# EAGLE board all_boards_revd_2 (EAGLE 6.1)
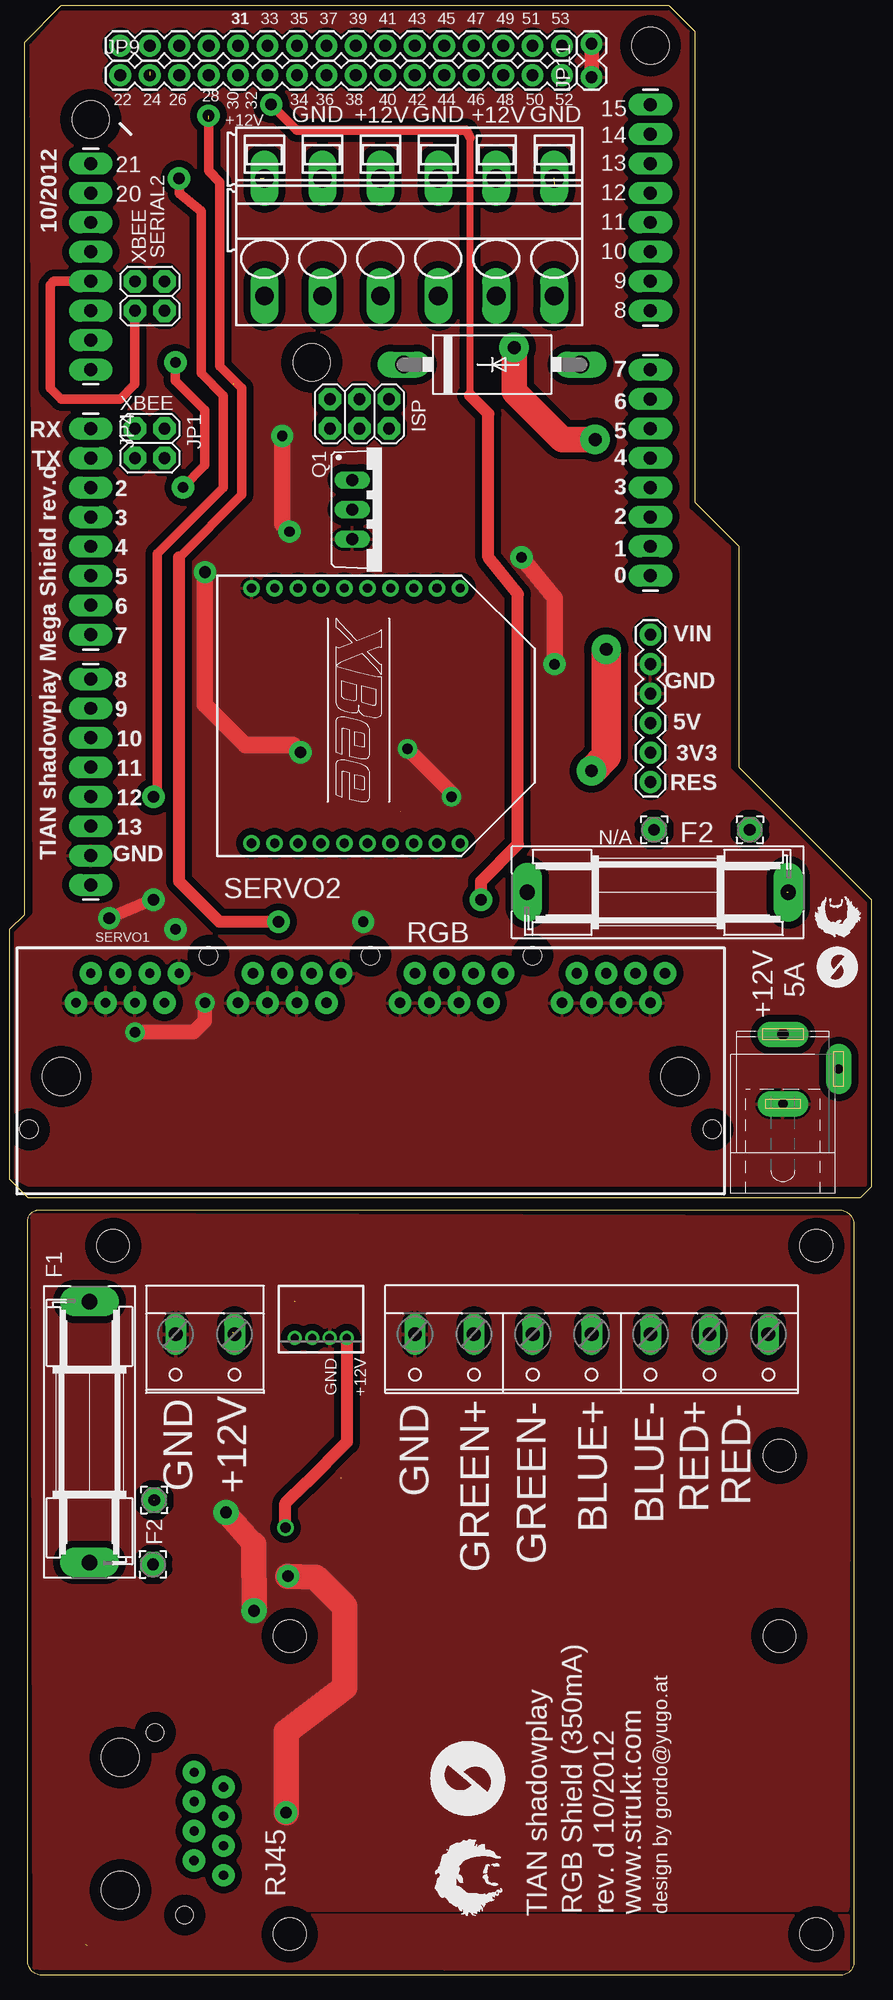
[diagram p0: board, top side]
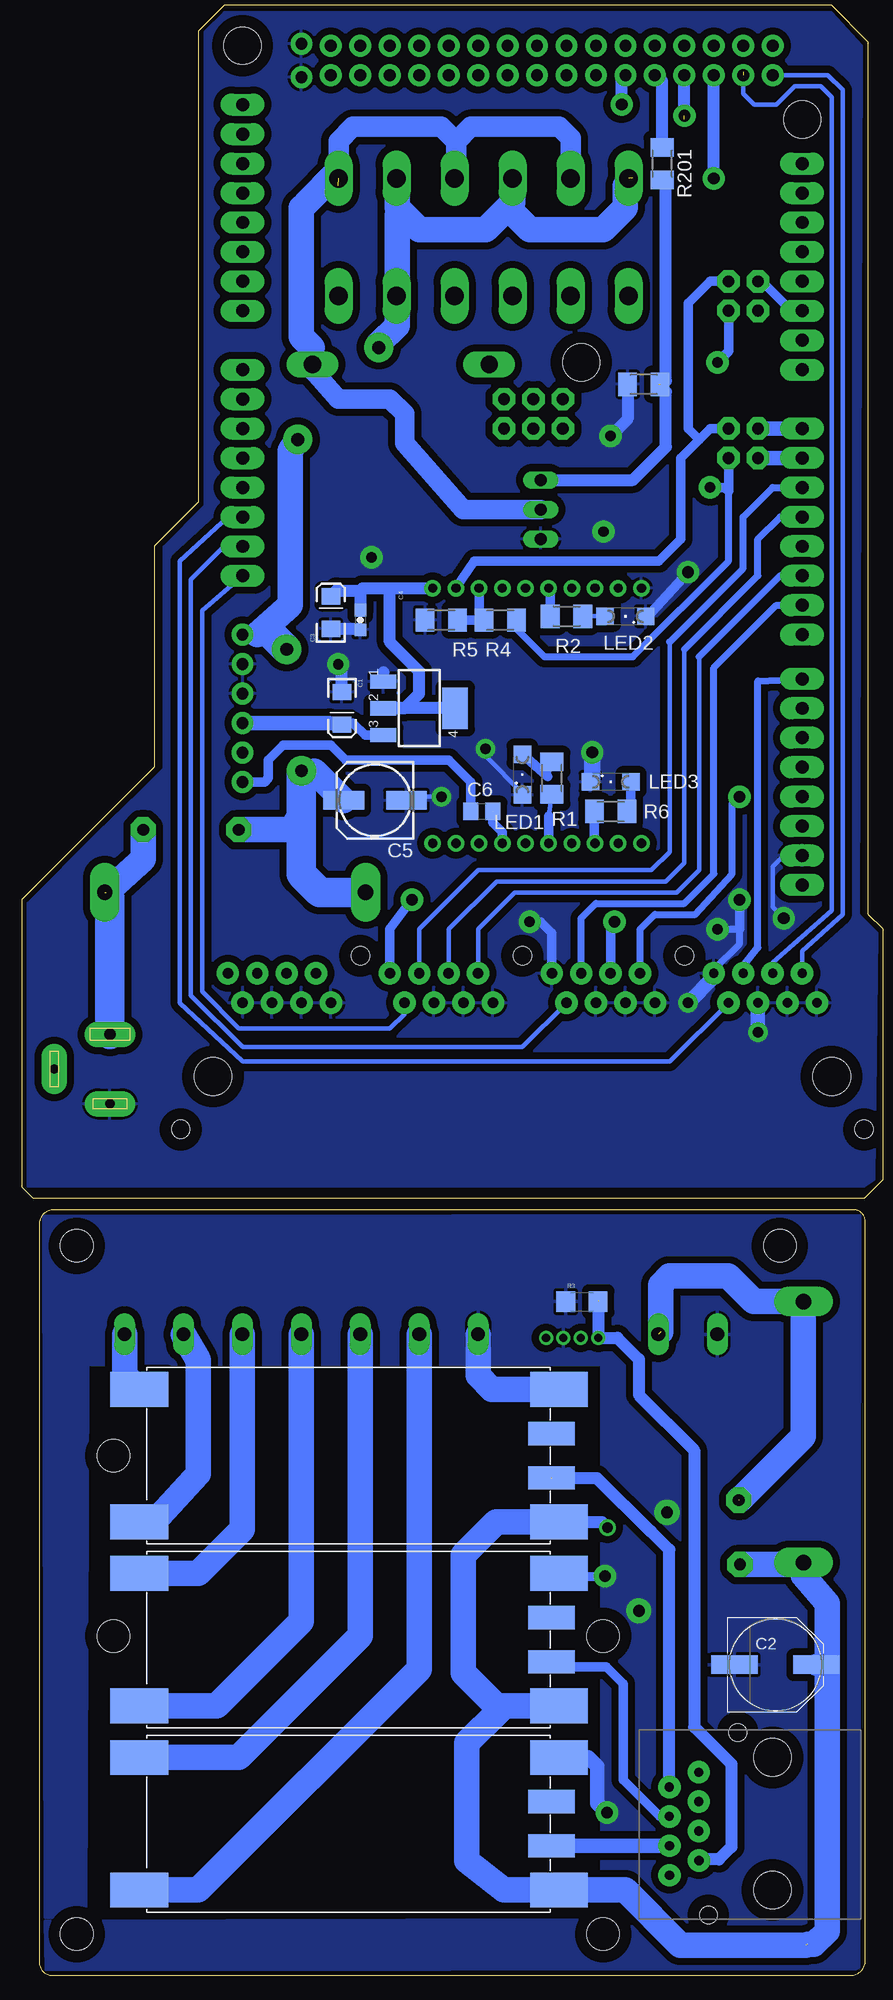
[diagram p1: board, bottom side, seen from below]

No outline drawn. Coordinates in mm, seen from the top.
Copper layers (1*16): Top 0.035mm / dielectric 1.5mm / Bottom 0.035mm
Design rules: minimum track width 10mil, minimum drill 24mil, track to track 10mil, track to pad 10mil, pad to pad 10mil, via to via 10mil, smd to smd 10mil, copper to edge 40mil, drill to drill 8mil, minimum pad ring 10mil, minimum via ring 8mil, stop-mask expansion 4mil, vias tented up to drill 0mil, thermal gap 10mil
Holes 3.2 mm at 5.21,160.4 53.47,166.75 24.26,139.45
Holes 2.8 mm at 67.77,63.23 7.12,63.23 67.77,3.86 64.59,29.58 64.59,45.14 22.36,29.58 22.36,3.86
Milling: 23 lines

## Footprints (pad centres in the part's own frame; a part is rotated, then mirrored left to right if it is on the bottom)
EIA3216 = smd 1.4 x 1.6: A 1.4,0; C -1.4,0
PANASONIC_F = smd 4 x 1.6: + 3.55,0; - -3.55,0
0603-CAP = smd 1.1 x 1: 1 -0.85,0; 2 0.85,0
153CLV-0605 = smd 3.5 x 1.6: + 2.7,0; - -2.7,0
C0805 = smd 1.3 x 1.5: 1 -0.95,0; 2 0.95,0
DO27-15 = drill 1.499 long: A 7.62,0; C -7.62,0
SH22,5 = drill 1.321 pad 2.54 long: 1 -11.252,0; 2 11.252,0
SOT223 = smd 1.219 x 2.235: 1 -2.311,-3.099; 2 0,-3.099; 3 2.311,-3.099 | smd 3.6 x 2.2: 4 0,3.099
2X03 = drill 1.016 pad 1.93 octagon: 1 -2.54,-1.27; 2 -2.54,1.27; 3 0,-1.27; 4 0,1.27; 5 2.54,-1.27; 6 2.54,1.27
SPC4077 = drill 0.8 pad 2.184 long: 1 -3,0; 2 0,-4.8 | drill 1 pad 2.184 long: 3 3,0
2X02 = drill 1.016 pad 1.93 octagon: 1 -1.27,-1.27; 2 -1.27,1.27; 3 1.27,-1.27; 4 1.27,1.27
1X08_LONGPADS = drill 1.118 pad 1.88 long: 1 0,0; 2 2.54,0; 3 5.08,0; 4 7.62,0; 5 10.16,0; 6 12.7,0; 7 15.24,0; 8 17.78,0
1X16 = drill 1.016 pad 1.88: 1 0,0; 2 2.54,0; 3 5.08,0; 4 7.62,0; 5 10.16,0; 6 12.7,0; 7 15.24,0; 8 17.78,0; 9 20.32,0; 10 22.86,0; 11 25.4,0; 12 27.94,0; 13 30.48,0; 14 33.02,0; 15 35.56,0; 16 38.1,0
1X06 = drill 1.016 pad 1.88: 1 0,0; 2 2.54,0; 3 5.08,0; 4 7.62,0; 5 10.16,0; 6 12.7,0
1X02_LOCK = drill 1.016 pad 1.88: 1 -0.178,0; 2 2.718,0
SML1206 = smd 1.5 x 1.5: A 1.75,0; C -1.75,0
2,15/1,0 = drill 1.016 pad 2.159 octagon: 1 0,0
4PORT_ETHERNET = drill 0.9 pad 1.93: P$1 25.4,8.89; P$2 24.13,6.35; P$3 22.86,8.89; P$4 21.59,6.35; P$5 20.32,8.89; P$6 19.05,6.35; P$7 17.78,8.89; P$8 16.51,6.35; P$9 11.43,8.89; P$10 10.16,6.35; P$11 8.89,8.89; P$12 7.62,6.35; P$13 6.35,8.89; P$14 5.08,6.35; P$15 3.81,8.89; P$16 2.54,6.35; P$17 -2.54,8.89; P$18 -3.81,6.35; P$19 -5.08,8.89; P$20 -6.35,6.35; P$21 -7.62,8.89; P$22 -8.89,6.35; P$23 -10.16,8.89; P$24 -11.43,6.35 | drill 0.8 pad 1.93: P$25 -16.51,8.89; P$26 -17.78,6.35; P$27 -19.05,8.89; P$28 -20.32,6.35; P$29 -21.59,8.89; P$30 -22.86,6.35; P$31 -24.13,8.89; P$32 -25.4,6.35 | hole 3.25: -26.67,0; 26.67,0 | hole 1.57: -13.97,10.41; 0,10.41; 13.97,10.41; -29.46,-4.57; 29.46,-4.57
TO220BV = drill 1.016 long: D 0,-2.54; G -2.54,-2.54; S 2.54,-2.54
M1206 = smd 1.6 x 2: 1 -1.4,0; 2 1.4,0
1206 = smd 1.6 x 1.8: 1 -1.4,0; 2 1.4,0
BUCK_LED_DRIVER = smd 5 x 3: ANODE -0.635,1.905; KATHODE -0.635,13.335; V+ 35.56,1.905; V- 35.56,13.335 | smd 4 x 2: PWM+ 34.925,5.715; PWM- 34.925,9.525
PHONEIX = drill 1.6 pad 1.8 long: 1 2.58,4.445; 2 7.58,4.445; 3 12.58,4.445; 4 17.58,4.445; 5 22.58,4.445; 6 27.58,4.445; 7 2.58,14.605; 8 7.58,14.605; 9 12.58,14.605; 10 17.58,14.605; 11 22.58,14.605; 12 27.58,14.605
1PORT_ETHERNET = drill 0.8 pad 1.93: P$1 -3.82,3.81; P$2 -6.36,2.54; P$3 -3.82,1.27; P$4 -6.36,0; P$5 -3.82,-1.27; P$6 -6.35,-2.54; P$7 -3.81,-3.81; P$8 -6.35,-5.08 | hole 3.25: 2.54,-6.35; 2.54,5.08 | hole 1.5: -3,-8.51; -0.46,7.24
W237-132 = drill 1.194 long: 1 -2.54,-0.635; 2 2.54,-0.635
W237-7P = drill 1.194 long: 1 -15.24,-0.635; 2 -10.16,-0.635; 3 -5.08,-0.635; 4 0,-0.635; 5 5.08,-0.635; 6 10.16,-0.635; 7 15.24,-0.635
S4B-ZR = drill 0.7 pad 1.1: 1 -2.25,0; 2 -0.75,0; 3 0.75,0; 4 2.25,0
XBEE = drill 0.8 pad 1.422: 1 -11,9; 2 -11,7; 3 -11,5; 4 -11,3; 5 -11,1; 6 -11,-1; 7 -11,-3; 8 -11,-5; 9 -11,-7; 10 -11,-9; 11 11,-9; 12 11,-7; 13 11,-5; 14 11,-3; 15 11,-1; 16 11,1; 17 11,3; 18 11,5; 19 11,7; 20 11,9

## Placement (x,y rotation side)
C1  10uF  [EIA3216]  44.89,109.6 270 bottom
C2  220uF  [PANASONIC_F]  7.51,27.1 0 bottom
C3  10uF  [EIA3216]  45.85,117.86 90 bottom
C4  0.1uF  [0603-CAP]  43.31,117.22 270 bottom
C5  [153CLV-0605]  42.04,101.66 180 bottom
C6  [C0805]  32.83,100.71 0 bottom
D1  BY550  [DO27-15]  39.81,139.26 0 top
F1  [SH22,5]  5.09,47.17 270 top
F2  [SH22,5]  54.1,93.73 180 top
IC2  MC33269ST-3.3T3  [SOT223]  38.23,109.6 270 bottom
ICSP  [2X03]  28.38,135 0 top
J201  [SPC4077]  64.9,78.49 90 top
JP1  [2X02]  10.29,132.46 270 top
JP2  [2X02]  10.29,145.16 270 top
JP3  [1X08_LONGPADS]  5.21,112.14 270 top
JP4  [1X08_LONGPADS]  5.21,133.73 270 top
JP5  [1X08_LONGPADS]  5.21,138.81 90 top
JP6  [1X08_LONGPADS]  53.47,143.89 90 top
JP7  [1X08_LONGPADS]  53.47,121.03 90 top
JP8  M16PTH  [1X16]  7.75,166.75 0 top
JP9  M16PTH  [1X16]  7.75,164.21 0 top
JP10  [1X06]  53.47,103.25 90 top
JP11  [1X02_LOCK]  48.39,164.21 90 top
LED1  [SML1206]  29.34,103.89 90 bottom
LED2  [SML1206]  20.45,117.54 180 bottom
LED3  [SML1206]  21.72,103.25 0 bottom
PAD1  [2,15/1,0]  62.04,99.12 90 top
PAD2  [2,15/1,0]  53.78,99.12 90 top
PAD5  [2,15/1,0]  10.67,41.3 0 top
PAD6  [2,15/1,0]  10.57,35.75 0 top
PORT201  4PORT_ETHERNET  [4PORT_ETHERNET]  29.34,77.85 0 top
Q1  IRF530  [TO220BV]  30.29,126.75 270 top
R1  1k  [M1206]  26.8,103.57 270 bottom
R2  1k  [M1206]  25.53,117.54 180 bottom
R3  10k  [1206]  24.19,58.42 0 bottom
R4  1k  [M1206]  31.24,117.22 180 bottom
R5  2k  [M1206]  36.32,117.22 180 bottom
R6  1k  [M1206]  21.72,100.71 180 bottom
R7  1k  [M1206]  18.86,137.54 0 bottom
R201  1k  [M1206]  17.27,156.59 270 bottom
U$1  BUCK_LED_DRIVER  [BUCK_LED_DRIVER]  61.73,37.52 0 bottom
U$2  BUCK_LED_DRIVER  [BUCK_LED_DRIVER]  61.73,21.64 0 bottom
U$3  BUCK_LED_DRIVER  [BUCK_LED_DRIVER]  61.73,5.77 0 bottom
U$4  MFKDSP6-5.08  [PHONEIX]  47.75,159.77 180 top
U$5  1PORT_ETHERNET  [1PORT_ETHERNET]  10.3,14.02 0 bottom
X1  [W237-132]  15.06,54.98 180 top
X3  [W237-7P]  48.4,54.98 180 top
X5  S4B-ZR  [S4B-ZR]  25.04,55.3 180 top
XB1  XBEE  [XBEE]  28.07,108.97 270 top

## Library data of the parts
C1 C3 C4 JP3-JP11 R3 = SparkFun
C2 C5 C6 R1 R2 R4-R7 R201 = rcl
D1 = diode
F1 F2 = fuse; MF: SCHURTER; MPN: 0031.8201; OC_FARNELL: 1162740; OC_NEWARK: 96F8317
IC2 = linear
ICSP JP1 JP2 = pinhead
J201 = con-jack; OC_FARNELL: unknown; OC_NEWARK: unknown
LED1-LED3 = led
PAD1 PAD2 PAD5 PAD6 = wirepad
PORT201 U$5 = strukt
Q1 = transistor-power
U$1-U$3 = tian
U$4 = con-phoenix-MFKDSP
X1 X3 = con-wago-508; OC_FARNELL: unknown; OC_NEWARK: unknown
X5 = con-jst; MF: FARNELL; MPN: S4B-ZR(LF)(SN); OC_FARNELL: 9491830; OC_NEWARK: 38K8076
XB1 = maxstream; MPN: XBP24-Z7UIT-004; OC_FARNELL: 1751799; OC_NEWARK: 34R5507

## Nets
3.3V: C3.A C4.1 IC2.2 IC2.4 XB1.1
5V: C1.A IC2.3 JP10.3
12V: C2.+ F1.2 PAD6.1 U$1.V+ U$2.V+ U$3.V+ X5.1
12V1: C5.+ F2.2 JP10.6 PAD2.1 U$4.2 U$4.4 U$4.6
+6V2: X5.3
A0: JP7.1 PORT201.P$10
A1: JP7.2 PORT201.P$18
A2: JP7.3 PORT201.P$26
A3: JP7.4
A3.3: JP10.2
A4: JP7.5
A5: JP7.6
A6: JP7.7
A7: JP7.8
A8: JP6.1
A9: JP6.2
A10: JP6.3
A11: JP6.4
A12: JP6.5
A13: JP6.6
A14: JP6.7
A15: JP6.8
AREF: JP3.8
D2: JP4.3 PORT201.P$11
D3: JP4.4 PORT201.P$13
D4: JP4.5
D5: JP4.6 PORT201.P$15
D6: JP4.7 PORT201.P$19
D7: JP4.8
D8: JP3.1 PORT201.P$27
D9: JP3.2
D10: JP3.3
D11: JP3.4
D12: JP3.5
D13: JP3.6
D14: JP5.8
D15: JP5.7
D16: JP5.6
D17: JP5.5
D18: JP2.3 JP5.4
D19: JP2.1 JP5.3
D22: JP9.1 PORT201.P$31
D23: JP8.16
D24: JP9.2 PORT201.P$29
D25: JP8.15
D26: JP9.3 PORT201.P$23
D27: JP8.14
D28: JP9.4 PORT201.P$21
D29: JP8.13
D30: JP9.5 R201.1
D31: JP8.12
D32: JP9.6 PORT201.P$9
D33: JP8.11
D34: JP9.7
D35: JP8.10
D36: JP9.8
D37: JP8.9
D38: JP9.9
D39: JP8.8
D40: JP9.10
D41: JP8.7
D42: JP9.11
D43: JP8.6
D44: JP9.12
D45: JP8.5
D46: JP9.13
D47: JP8.4
D48: JP9.14
D49: JP8.3
D50: JP9.15
D51: JP8.2
D52: JP9.16
D53: JP8.1
DIN: R4.2 R5.1 XB1.3
DOUT: JP1.2 JP2.2 XB1.2
DRAIN: D1.A Q1.D U$4.1 U$4.3 U$4.5
GND: C2.- R3.1 U$1.V- U$2.V- U$3.V- X1.2 X3.7 X5.2
GND1: C1.C C3.C C4.2 C5.- IC2.1 J201.1 JP3.7 JP10.4 JP10.5 JP11.1 JP11.2 LED1.C LED2.C LED3.C PORT201.P$2 PORT201.P$4 PORT201.P$6 PORT201.P$8 PORT201.P$12 PORT201.P$14 PORT201.P$16 PORT201.P$17 PORT201.P$20 PORT201.P$22 PORT201.P$24 PORT201.P$25 PORT201.P$28 PORT201.P$30 PORT201.P$32 Q1.S R5.2 R7.1 XB1.10
LED_ANODE_BLUE: U$2.ANODE X3.4
LED_ANODE_GREEN: U$3.ANODE X3.6
LED_ANODE_RED: U$1.ANODE X3.2
LED_KATHODE_BLUE: U$2.KATHODE X3.3
LED_KATHODE_GREEN: U$3.KATHODE X3.5
LED_KATHODE_RED: U$1.KATHODE X3.1
N$1: F1.1 PAD5.1 X1.1
N$4: Q1.G R7.2 R201.2
N$5: LED1.A R1.1
N$6: R1.2 XB1.15
N$7: LED2.A R2.1
N$8: R2.2 XB1.6
N$9: JP1.4 JP2.4 R4.1
N$10: R6.2 XB1.13
N$11: LED3.A R6.1
N$12: C6.2 XB1.17
N$13: F2.1 J201.3 PAD1.1
PWM_BLUE: U$2.PWM+ U$5.P$4
PWM_GREEN: U$3.PWM+ U$5.P$6
PWM_RED: U$1.PWM+ U$5.P$2
RES: C6.1 JP10.1
RX0: JP1.1 JP4.1
SCL: JP5.1
SDA: JP5.2
TEMP: R3.2 U$5.P$7 X5.4
TX1: JP1.3 JP4.2
VCC: D1.C

## Tracks (layer width: path | path; a pad name or v marks a point on that pad's centre or on a via)
3.3V
  Bottom 1.016: C3.A 45.34,119.76 43.31,119.76 | 43.31,119.76 43.1,119.97 40.77,119.97 | 40.77,119.97 XB1.1 | 43.31,119.76 C4.1 | IC2.4 IC2.2 | IC2.2 41.4,109.6 | IC2.2 39.5,109.6 38.23,110.87 38.23,112.78 40.77,115.32 40.77,119.97
5V
  Bottom 0.406: C1.A 45.02,108.2
  Bottom 0.813: IC2.3 42.9,107.29 43.94,108.33 45.72,108.33 C1.A
  Bottom 1.27: JP10.3 45.98,108.33 C1.A
12V  (via drill 0.9 pad 1.42)  (1 unrouted)
  Top 1.016: X5.1 27.29,46.31 23.77,42.79 | 23.77,42.79 23.72,42.74 | v22,38.94 22,41.05 23.74,42.79 23.77,42.79
  Bottom 1.016: U$1.V+ 22.48,39.42 v22,38.94
  Bottom 1.676: U$3.V+ 27.76,7.67 | 28.4,23.55 26.49,23.55 U$2.V+ | U$1.V+ 28.71,39.42
  Bottom 1.93: 31.25,23.23 30.94,23.55 | 26.49,23.55 26.49,23.86 | C2.+ 3.06,27.1
  Bottom 2.184: 4.9,2.91 15.7,2.91 20.46,7.67 U$3.V+ | 27.76,7.67 30.94,7.67 34.11,10.21 34.11,20.37 31.25,23.23 34.43,26.4 34.43,36.56 31.57,39.42 28.71,39.42 | 30.94,23.55 26.49,23.55 | F1.2 5.09,34.82 3.06,32.41 3.06,27.1 3.06,4.12 4.2,2.97 4.71,2.97 | 5.63,35.76 F1.2 | PAD6.1 5.09,35.75 F1.2
12V1  (via drill 1.1 pad 2.54)  (1 unrouted)
  Top 2.184: v48.7,132.78 45.85,132.78 41.72,136.91 v41.72,140.72
  Top 2.54: v49.66,114.68 49.66,105.47 v48.39,104.2
  Bottom 1.016: U$4.4 30.17,152.35 | 40.13,155.28 U$4.2 40.13,155.32
  Bottom 1.676: 50.93,115.95 JP10.6 52.2,115.95 | v48.39,104.2 47.28,104.2 | v41.72,140.72 41.72,141.03 | 40.13,152.15 39.81,152.46
  Bottom 1.778: 20.45,154.69 19.81,155.32 | 39.81,152.46 40.13,152.78
  Bottom 2.184: 30.17,152.35 28.7,150.88 22.35,150.88 20.45,152.78 20.45,154.69 | U$4.4 30.17,153.22 32.51,150.88 38.23,150.88 39.81,152.46 | 40.13,152.78 40.13,155.28 | 47.28,104.2 C5.+ | 52.2,115.95 49.34,118.49 49.34,131.83 v48.7,132.78 | 41.72,141.03 40.13,142.62 40.13,152.15 | PAD2.1 49.34,99.12 48.7,99.76
  Bottom 2.54: 50.93,115.95 v49.66,114.68 | F2.2 46.8,93.73 48.39,95.31 48.39,100.08 | 48.39,100.08 v48.39,104.2 | 48.7,99.76 48.39,100.08
A0
  Bottom 0.406: PORT201.P$10 39.5,83.25 40.77,81.98 53.78,81.98 56.96,85.15 56.96,118.05 JP7.1
A1
  Bottom 0.406: JP7.2 54.86,123.76 57.91,120.71 57.91,84.84 53.47,80.39 29.34,80.39 PORT201.P$18
A2
  Bottom 0.406: JP7.3 54.74,126.11 58.86,122.3 58.86,84.2 53.47,79.12 16.64,79.12 PORT201.P$26
D2
  Bottom 0.406: PORT201.P$11 38.23,90.55 33.15,95.63 18.22,95.63 16.64,97.22 16.64,115.32
  Bottom 0.61: 16.64,115.32 10.29,121.67 10.29,126.11 7.75,128.65 JP4.3
D3
  Bottom 0.406: PORT201.P$13 35.69,90.55 31.56,94.68 16.95,94.68 15.37,96.27 15.37,114.68
  Bottom 0.61: 15.37,114.68 9.02,121.03 9.02,124.21 7.11,126.11 JP4.4
D5
  Bottom 0.406: PORT201.P$15 33.15,90.55 29.97,93.73 16,93.73 14.1,95.63 14.1,114.05
  Bottom 0.61: 14.1,114.05 7.11,121.03 JP4.6
D6
  Bottom 0.61: PORT201.P$19 24.26,91.5 22.99,92.77 15.37,92.77 12.83,95.31 12.83,113.09 7.43,118.49 JP4.7
D8
  Bottom 0.406: PORT201.P$27 10.29,87.38
  Bottom 0.61: 10.29,87.38 9.02,88.96 9.02,111.95 JP3.1
D18
  Top 0.813: JP2.3 9.02,137.54 7.75,136.27 2.67,136.27 1.71,137.22 1.71,146.11 2.03,146.43 JP5.4
D19
  Bottom 0.813: JP2.1 8.7,146.43 6.16,143.89 JP5.3
D22
  Bottom 0.406: PORT201.P$31 5.21,88.65 1.71,91.82 1.71,162.94 2.98,164.21 JP9.1
D24  (1 unrouted)
  Bottom 0.406: PORT201.P$29 7.75,87.69 2.67,92.14 2.67,162.31 3.62,163.26 5.84,163.26 7.43,161.67 9.34,161.67 10.29,162.62 10.29,164.53 | 9.97,163.77 JP9.2
D26  (via drill 1 pad 1.93)
  Top 0.406: 10.92,102.3 v10.6,101.98
  Top 0.813: v12.83,155.32 12.83,154.05 14.73,152.46 14.73,138.49 16.64,136.59 16.64,128.65 10.92,122.94 10.92,102.3
  Bottom 0.61: PORT201.P$23 19.18,90.55 17.91,91.82 14.41,91.82 11.24,95.31 11.24,101.35 v10.6,101.98
  Bottom 1.016: v12.83,155.32 JP9.3
D28  (via drill 1 pad 1.93)  (1 unrouted)
  Top 0.813: 12.83,122.62 18.22,128.02 18.22,137.22 16.32,139.13 16.32,155 15.37,155.96 15.37,160.4 15.05,160.72
  Top 1.016: 12.83,122.62 12.83,94.68 16.32,91.19 v21.4,91.19
  Bottom 0.813: PORT201.P$21 21.72,90.87 v21.4,91.19
  Bottom 1.016: v15.37,160.72 JP9.4
D30
  Bottom 0.406: 17.27,163.7 JP9.5
  Bottom 1.016: R201.1 17.27,163.7
D32  (via drill 1 pad 1.93)
  Top 0.61: 37.91,136.59 37.91,158.81
  Top 0.813: 37.91,158.81 37.59,159.45 22.99,159.45 v20.77,161.67
  Top 1.016: v38.86,93.09 38.86,94.68 42.04,97.85 42.04,119.44 39.5,122.62 39.5,135 37.91,136.59
  Bottom 0.813: PORT201.P$9 40.77,90.55 v38.86,93.09
  Bottom 1.016: v20.77,161.67 20.77,163.77 JP9.6
DIN
  Bottom 0.406: 33.07,117.65 R4.2
  Bottom 0.813: R4.2 R5.1 | XB1.3 33.07,117.65
DOUT
  Bottom 0.813: XB1.2 33.48,122.29 32.19,122.3 17.59,122.3 15.68,124.21 15.68,131.19 14.1,132.78 | 14.1,132.78 13.14,133.73 JP1.2 | JP2.2 13.14,146.43 15.05,144.53 15.05,133.73 14.1,132.78
DRAIN  (1 unrouted)
  Bottom 1.27: D1.A 47.43,140.72 | 48.39,152.78 48.07,153.1
  Bottom 1.422: 45.21,154.69 45.21,155.96
  Bottom 1.676: 35.05,155.44 U$4.3 | 47.43,138.81 45.21,136.27 40.77,136.27 39.5,135 39.5,132.46 34.42,126.75 Q1.D
  Bottom 1.778: U$4.1 45.17,158.54 43.94,159.77 36.32,159.77 35.05,158.5 | 35.05,158.5 35.05,155.44 | U$4.5 25.17,158.78 26.16,159.77 33.78,159.77 35.05,158.5 | 47.43,138.81 D1.A
  Bottom 2.184: 48.07,153.1 45.21,155.96 | 47.43,140.72 48.39,141.67 48.39,152.78
GND  (via drill 1 pad 1.93, 1 pad 2.18)
  Top 1.93: 19.28,37.49 v16.87,40.25
  Top 2.184: v19.29,31.75 19.28,37.49 | v22.05,14.34 22.05,21.32 27.13,25.13 27.13,32.12 24.59,34.66 v22.21,34.73
  Bottom 0.813: v22.21,34.73 25.86,34.66 U$2.V-
  Bottom 1.27: U$3.V- 23.64,19.1 22.87,18.34 22.87,15.16 v22.05,14.34
  Bottom 2.184: X3.7 33.16,52.05 31.97,50.85 U$1.V-
  pour Bottom (isolate 0.61): 0.58,0.88 70.38,0.8 70.46,4.97 23.84,5.09 23.76,7.54 22.49,7.54 22.49,53.01 66.81,53.01 66.97,5.32 70.48,5.3 70.61,65.76 0.23,65.86 0.33,0.99
  pour Top (isolate 0.61): 0.77,0.9 70.52,0.84 70.54,5.45 23.63,5.51 23.76,7.54 24.02,7.54 23.89,5.89 70.42,5.92 70.52,6.29 70.57,65.71 0.18,65.93 0.33,0.98
GND1  (via drill 0.9 pad 1.68, 0.9 pad 1.93, 1 pad 1.93)
  Top 0.406: v36.32,101.98 36.32,102.3
  Top 1.016: v10.6,93.09 v6.79,91.5
  Top 1.27: JP11.2 JP11.1 | 36.32,102.3 v32.51,106.11 | v15.05,84.2 15.05,82.61 14.1,81.66 v9.02,81.66
  Top 1.422: v15.05,121.35 15.05,109.92 18.54,106.43 22.67,106.43 v23.3,105.79 | v45.21,113.41 45.21,119.13 v42.35,122.62 | v21.72,133.1 21.72,125.48 v22.35,124.84
  Bottom 0.406: LED2.C 18.22,117.86 | 23.3,103.41 LED3.C | 12.83,87.06 PORT201.P$25 12.83,86.42 | JP3.7 6.79,96.9 7.75,95.95 7.75,92.46 v6.79,91.5 | C5.- 39.34,101.98 v36.32,101.98 | v32.51,106.11 32.51,105.47 29.34,102.3
  Bottom 0.61: 12.83,87.06 10.6,89.28 10.6,90.55 v12.51,90.55
  Bottom 0.813: 18.22,117.86 v15.05,121.35 | 10.6,90.55 v10.6,93.09 | PORT201.P$17 26.8,90.23 27.75,91.19 v28.7,91.19
  Bottom 1.016: C3.C 43.39,116.46 C4.2 | C1.C 44.9,113.09 v45.21,113.41 | R7.1 20.26,134.55 v21.72,133.1 | IC2.1 41.33,112.7
  Bottom 1.27: 12.83,86.42 v15.05,84.2 | v9.02,81.66 9.02,84.52
  Bottom 1.422: v23.3,105.79 23.3,103.41
  pour Bottom (isolate 0.61): 72.01,68.39 -0.19,68.39 -1.02,68.96 -1.27,90.23 0.32,91.82 0.06,166.75 2.67,169.61 55.05,169.61 56.71,167.96 56.71,127.06 60.26,123.51 60.26,104.39 62.36,102.3 65.98,98.81 72.01,92.77
  pour Top (isolate 0.61): 72.01,68.45 -0.19,68.45 -1.27,69.02 -1.27,90.3 0.32,91.88 0.06,166.81 2.67,169.67 55.05,169.67 56.71,168.02 56.71,126.87 60.26,123.57 60.26,104.46 62.36,102.36 66.48,98.36 72.01,92.84
LED_ANODE_BLUE
  Bottom 2.184: U$2.ANODE 55.7,23.55 48.4,30.85 X3.4
LED_ANODE_GREEN
  Bottom 2.184: U$3.ANODE 57.29,7.67 38.24,26.72 X3.6
LED_ANODE_RED
  Bottom 1.93: U$1.ANODE 61.1,39.42
  Bottom 2.184: 61.1,39.42 57.29,43.55 57.29,53.39 X3.2
LED_KATHODE_BLUE
  Bottom 2.184: X3.3 53.48,38.79 57.29,34.98 U$2.KATHODE
LED_KATHODE_GREEN
  Bottom 2.184: U$3.KATHODE 53.8,19.1 43.32,29.58 X3.5
LED_KATHODE_RED
  Bottom 1.676: U$1.KATHODE 62.37,51.17 63.64,52.44
  Bottom 2.184: 63.64,52.44 X3.1
N$1  (2 unrouted)
  Bottom 2.184: 17.41,55.8 17.41,59.87 16.65,60.63 11.57,60.63 9.36,58.42 F1.1 5.09,46.8 10.63,41.26 10.63,41.3 10.68,41.35
N$4  (1 unrouted)
  Bottom 1.016: Q1.G 19.81,129.29 16.95,132.14 16.95,136.91 17.59,137.54 | R7.2 17.27,137.54 16.95,137.86 16.95,154.87 R201.2
N$5
  Bottom 0.406: 27.15,103.73 R1.1
  Bottom 0.813: LED1.A 27.15,103.73
N$6
  Bottom 0.406: 27.07,100.31 R1.2
  Bottom 0.813: XB1.15 27.07,100.31
N$7
  Bottom 0.406: R2.1 LED2.A
N$8
  Bottom 0.406: 26.93,119.83 XB1.6
  Bottom 0.813: R2.2 26.93,119.83
N$9  (via drill 0.9 pad 1.93)
  Top 0.813: v12.51,139.45 12.51,137.86 15.05,135.32 15.05,130.56 v13.14,128.65
  Bottom 0.406: R4.1 29.84,116.46
  Bottom 0.61: 29.84,116.46 27.43,114.05 19.81,114.05 11.56,122.3 11.56,128.33 | 11.56,128.65 JP1.4
  Bottom 0.813: JP2.4 11.56,140.4 v12.51,139.45 | v13.14,128.65 11.87,128.65 11.56,128.33 11.56,128.65 11.56,131.51
N$10
  Bottom 0.406: 23.12,98.02 XB1.13
  Bottom 0.813: R6.2 23.12,98.02
N$11
  Bottom 0.406: 19.97,101.06 R6.1
  Bottom 0.813: LED3.A 19.97,101.06
N$12  (1 unrouted)
  Bottom 0.813: XB1.17 31.07,98.95 31.88,99.76 C6.2
N$13  (1 unrouted)
  Bottom 2.184: PAD1.1 62.04,96.58 65.22,93.73
  Bottom 2.54: J201.3 64.9,93.27 F2.1
PWM_BLUE
  Bottom 0.406: 20.65,17.26 20.65,17.2
  Bottom 0.813: 20.65,17.26 20.65,25.45 22.11,26.91 26.36,26.91 U$2.PWM+ | 20.65,17.2 17.48,14.02 U$5.P$4
PWM_GREEN
  Bottom 1.27: U$5.P$6 U$3.PWM+
PWM_RED  (1 unrouted)
  Bottom 1.016: U$5.P$2 16.66,37.02 18.25,38.61 18.33,38.61 22.9,43.18 26.78,43.18
RES
  Bottom 0.813: C6.1 33.78,103.25 35.69,105.16 44.58,105.16 45.85,106.43 49.97,106.43 51.24,105.16 51.24,103.57 51.56,103.25 JP10.1
RX0
  Bottom 1.27: JP4.1 JP1.1
TEMP  (1 unrouted)
  Bottom 1.016: 22.76,58.48 22.76,55.3 X5.4 21.14,55.3 19.29,53.44 19.29,50.39 14.52,45.62 14.52,21.74 11.32,18.54 11.32,11.38 12.38,10.31 14.01,10.31 U$5.P$7
TX1
  Bottom 1.27: JP1.3 JP4.2

## Text on the board
tPlace: 31 | 33 | 35 | 37 | 39 | 41 | 43 | 45 | 47 | 49 | 51 | 53 | 22 | 24 | 26 | 28 | 30 | 32 | 34 | 36 | 38 | 40 | 42 | 44 | 46 | 48 | 50 | 52 | GND | GND | GND | 15 | +12V | +12V | +12V | 14 | 10/2012 | 21 | 13 | SERIAL2 | 20 | 12 | 11 | 10 | XBEE | 9 | 8 | 7 | XBEE | 6 | RX | 5 | ISP | TX | 4 | TIAN shadowplay Mega Shield rev.d | 2 | 3 | 3 | 2 | 4 | 1 | 5 | 0 | 6 | 7 | VIN | 8 | GND | 9 | 5V | 10 | 3V3 | 11 | RES | 12 | 13 | N/A | GND | SERVO2 | RGB | SERVO1 | 5A | +12V | F1 | GND | +12V | RED- | GND | +12V | GND | F2 | RED+ | BLUE+ | BLUE- | GREEN- | GREEN+ | RJ45 | RGB Shield (350mA) | rev. d 10/2012 | www.strukt.com | design by gordo@yugo.at | TIAN shadowplay